# Altium PCB HeadBoard.PcbDoc
Units mm, origin at the board's own origin, x right, y up, seen from the top; angles counter-clockwise.
Board outline 152.4 x 101.6 mm, 2 copper layers (Top Layer, Bottom Layer); 27 components, 34 nets, 166 pads, 0 vias.
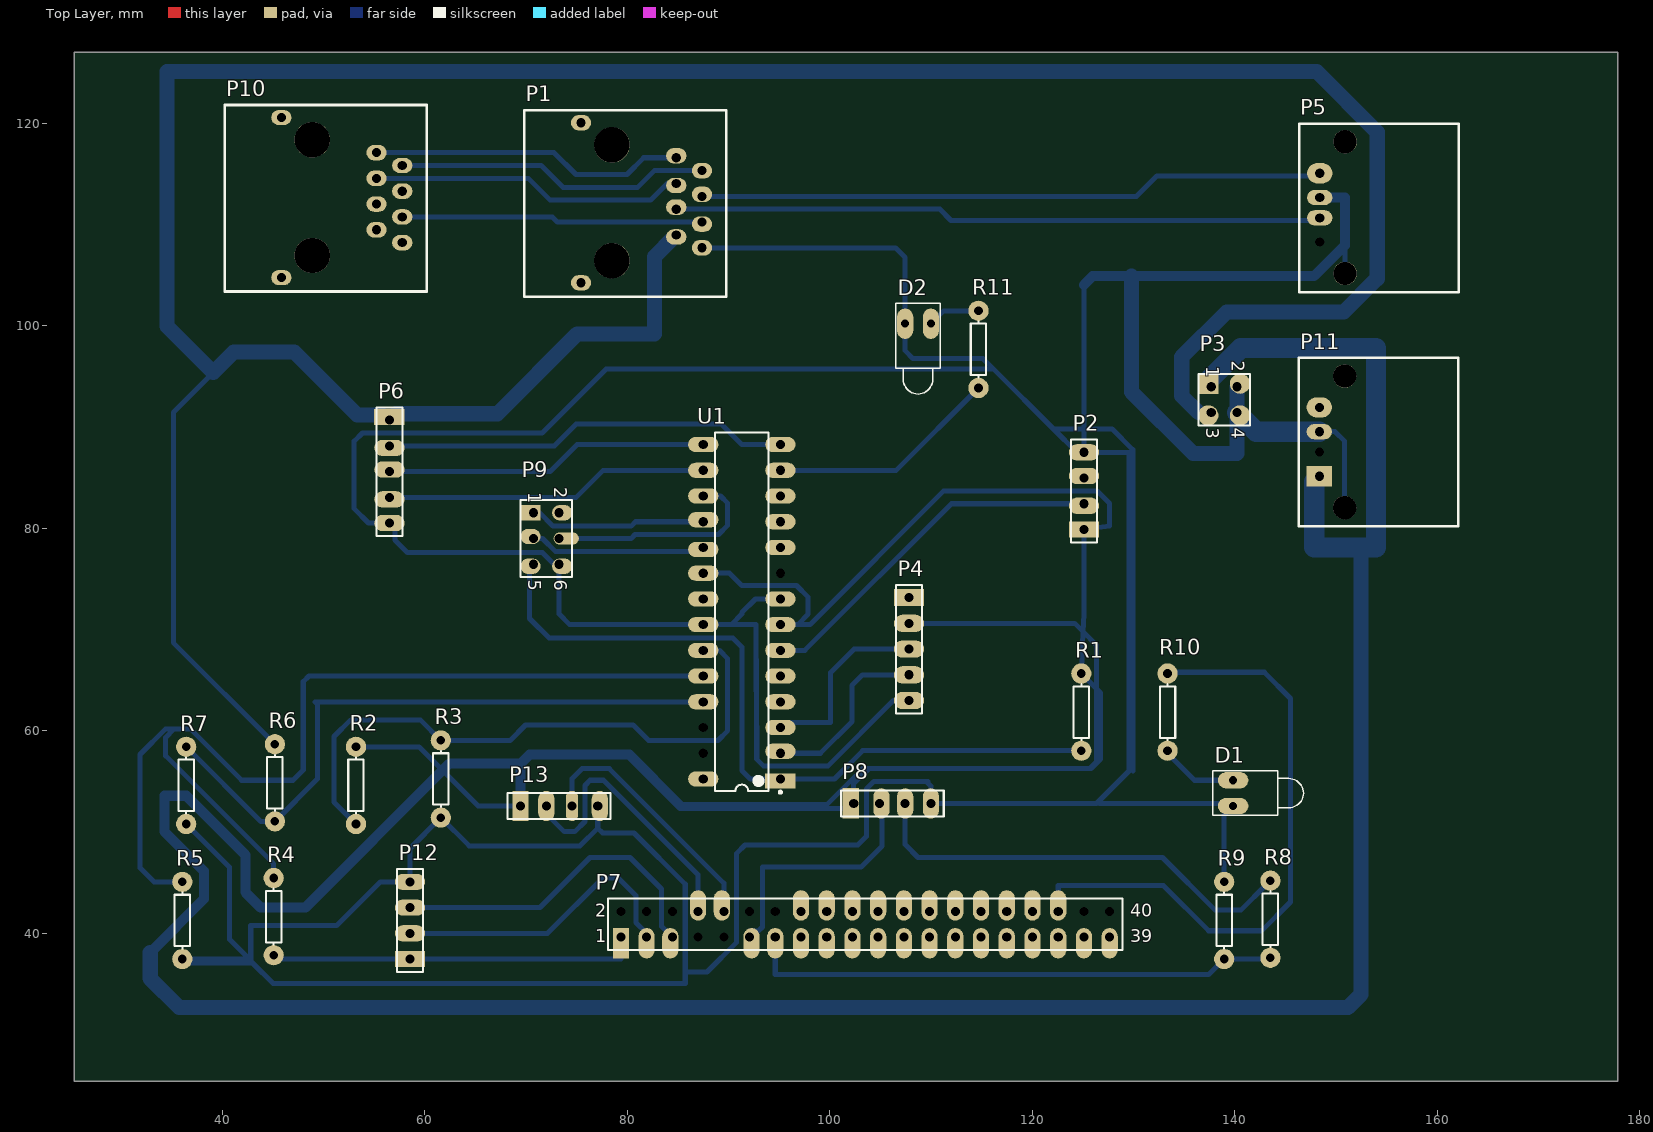
[diagram p0: Top Layer view]
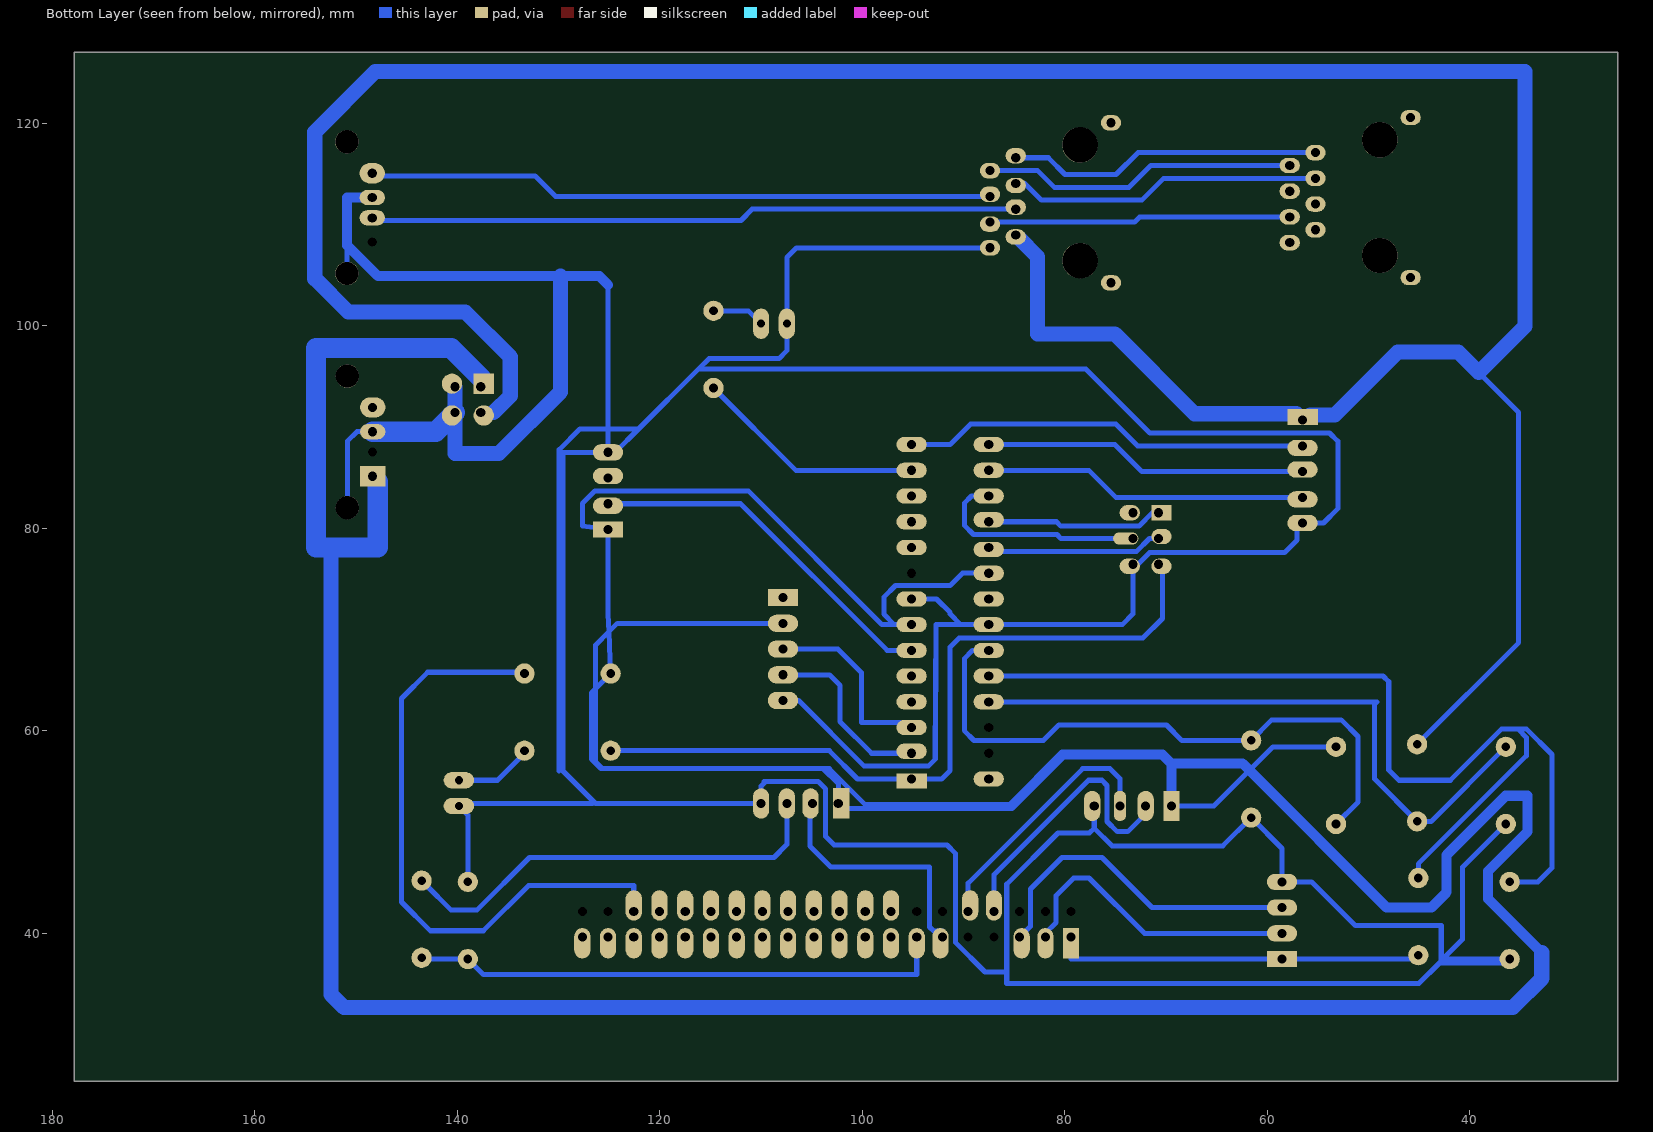
[diagram p1: Bottom Layer view, seen from below]

## Layer stack, top to bottom
Top Solder: solder mask 0.0102, Solder Resist, Dk 3.5
Top Layer: signal copper 0.0356
Dielectric 1: dielectric 0.32, FR-4, Dk 4.8
Bottom Layer: signal copper 0.0356
Bottom Solder: solder mask 0.0102, Solder Resist, Dk 3.5

## Board outline
25.4,25.4 177.8,25.4 177.8,127 25.4,127

## Design rules (kind name [scope] priority, off if disabled: settings)
Clearance [All] p1: gap=0.2
PolygonConnect [All] p1: connectstyle=Relief reliefconductorwidth=0.254 reliefentries=4 polygonreliefangle="90 Angle" airgapwidth=0.254
RoutingLayers [All] p1: top layer_v5=FALSE bottom layer_v5=TRUE
RoutingVias [All] p1: holewidth=0.711 width=1.27 viastyle="Through Hole" minholewidth=0.711 minwidth=1.27 maxholewidth=0.711 maxwidth=1.27
SolderMaskExpansion [All] p1: expansion=0.102
Width [All] p1: maxlimit=2 minlimit=0.2 preferedwidth=0.5
29 further rules are at their usual default settings.

## Components (designator, comment, footprint, x,y, rotation, side; value= is the part's Value field where it differs from the comment)
D1 "Green" LED-1 139.827,53.848 r0 top
D2 "Red" LED-1 108.712,100.203 r270 top
P1 "RJ45 PUE - Tail" RJ45#1 87.376,115.316 r270 top
P2 "DHT11" HDR1X4#1 125.095,79.883 r90 top
P3 "Buck Conveter" HDR2X2 137.668,93.98 r270 top
P4 "USB to TTL - RPi" HDR1X5#1 107.823,73.152 r270 top
P5 "USB Data - RPi" USB_Female#1 148.376,108.256 r90 top
P6 "Flash" HDR1X5#2 56.515,90.678 r270 top
P7 "IDE GPIO - RPi" HDR2X20 79.375,39.624 r0 top
P8 "JSN-SR04T" HDR1X4#2 102.362,52.832 r0 top
P9 "ICSP" HDR2X3 70.739,81.534 r270 top
P10 "RJ45 Ethernet - RPi" RJ45#2 57.785,115.824 r270 top
P11 "USB Power - RPi" USB_Female#2 148.336,85.135 r90 top
P12 "ADXL345" HDR1X4#3 58.547,37.465 r90 top
P13 "RPi UART" HDR1X4#4 69.469,52.578 r0 top
R1 "Res1" AXIAL-0.3 124.841,61.849 r90 top
R2 "Res1" AXIAL-0.3 53.213,54.61 r90 top
R3 "Res1" AXIAL-0.3 61.595,55.245 r90 top
R4 "Res1" AXIAL-0.3 45.085,41.656 r270 top
R5 "Res1" AXIAL-0.3 36.068,41.275 r90 top
R6 "Res1" AXIAL-0.3 45.212,54.864 r90 top
R7 "Res1" AXIAL-0.3 36.449,54.61 r90 top
R8 "Res1" AXIAL-0.3 143.51,41.402 r270 top
R9 "Res1" AXIAL-0.3 138.938,41.275 r270 top
R10 "Res1" AXIAL-0.3 133.35,61.849 r90 top
R11 "Res1" AXIAL-0.3 114.681,97.663 r270 top
U1 "ATmega328-PU" 28P3 91.313,71.755 r180 top

## Footprints (in the part's own frame and the unit in brackets; to place one, negate y for a bottom-side part, rotate by r counter-clockwise, add the part's x,y. Pads: shape width x height; smd on the part's side, far side on the other; paste and mask are expansions set on the pad)
28P3 [mm] "DIP, 28-Leads, Row Spacing 7.62mm, Pitch 2.54mm, Body 34.67x7.3mm"
  rect 3x1.5 hole 0.9 copper offset 0,0.2: 1(-3.81,16.51)
  oval 3x1.5 hole 0.9 copper offset 0,-0.2: 2(-3.81,13.97) 18(3.81,-8.89)
  oval 3x1.5 hole 0.9: 3(-3.81,11.43) 4(-3.81,8.89) 5(-3.81,6.35) 6(-3.81,3.81) 7(-3.81,1.27) 8(-3.81,-1.27) 10(-3.81,-6.35) 11(-3.81,-8.89) 12(-3.81,-11.43) 13(-3.81,-13.97) 14(-3.81,-16.51) 15(3.81,-16.51) 16(3.81,-13.97) 17(3.81,-11.43) 20(3.81,-3.81) 21(3.81,-1.27) 22(3.81,1.27) 23(3.81,3.81) 24(3.81,6.35) 25(3.81,8.89) 28(3.81,16.51)
  round 0.5 hole 0.9: 9(-3.81,-3.81) 26(3.81,11.43) 27(3.81,13.97)
  oval 3x1.5 hole 0.9 copper offset 0,0.2: 19(3.81,-6.35)
  silkscreen extent -3.94,-17.7 2.65,17.93, body extent -3.6,-17.65 3.6,17.65, height 4.58
AXIAL-0.3 [mm] "Axial Device, Thru-Hole; 2 Leads; 0.3 in Pin Spacing"
  round 2 hole 0.85: 1(-3.81,0) 2(3.81,0)
  silkscreen extent -2.77,-0.76 2.77,0.76
HDR1X4#1 [mm] "Connector; Header; 4 Position"
  rect 1.6x3 hole 0.9: 1(0,0)
  oval 1.6x3 hole 0.9 copper offset -0.2,0: 2(2.54,0)
  oval 1.6x3 hole 0.9 copper offset 0.2,0: 3(5.08,0)
  oval 1.6x3 hole 0.9: 4(7.62,0)
  silkscreen extent -1.27,-1.27 8.89,1.27
HDR1X4#2 [mm] "Connector; Header; 4 Position"
  rect 1.6x3 hole 0.9 copper offset -0.3,0: 1(0,0)
  oval 1.6x3 hole 0.9 copper offset 0.2,0: 2(2.54,0)
  oval 1.6x3 hole 0.9: 3(5.08,0) 4(7.62,0)
  silkscreen extent -1.27,-1.27 8.89,1.27
HDR1X4#3 [mm] "Connector; Header; 4 Position"
  rect 1.6x3 hole 0.9: 1(0,0)
  oval 1.6x3 hole 0.9: 2(2.54,0) 3(5.08,0) 4(7.62,0)
  silkscreen extent -1.27,-1.27 8.89,1.27
HDR1X4#4 [mm] "Connector; Header; 4 Position"
  rect 1.6x3 hole 0.9: 1(0,0)
  oval 1.6x3 hole 0.9: 2(2.54,0)
  oval 1.2x3 hole 0.9: 3(5.08,0)
  oval 1.6x3 hole 0.9 copper offset 0.2,0: 4(7.62,0)
  silkscreen extent -1.27,-1.27 8.89,1.27
HDR1X5#1 [mm] "Connector; Header; 5 Position"
  rect 1.7x3 hole 0.9: 1(0,0)
  oval 1.7x3 hole 0.9: 2(2.54,0) 3(5.08,0) 4(7.62,0) 5(10.16,0)
  silkscreen extent -1.27,-1.27 11.43,1.27
HDR1X5#2 [mm] "Connector; Header; 5 Position"
  rect 1.6x3 hole 0.9 copper offset -0.3,0: 1(0,0)
  oval 1.6x3 hole 0.9 copper offset 0.2,0: 2(2.54,0) 4(7.62,0)
  oval 1.6x3 hole 0.9 copper offset -0.2,0: 3(5.08,0)
  oval 1.6x3 hole 0.9: 5(10.16,0)
  silkscreen extent -1.27,-1.27 11.43,1.27
HDR2X2 [mm] "Connector; Header; 2x2 Position"
  rect 2x2 hole 0.9 copper offset -0.3,-0.3: 1(0,0)
  round 2 hole 0.9 copper offset -0.3,0.3: 2(0,2.54)
  round 2 hole 0.9 copper offset 0.3,-0.3: 3(2.54,0)
  round 2 hole 0.9 copper offset 0.3,0.3 paste+0: 4(2.54,2.54)
  silkscreen extent -1.27,-1.27 3.81,3.81
HDR2X3 [mm] "Connector; Header; 3x2 Position"
  rect 1.5x2 hole 0.9 copper offset 0,-0.3: 1(0,0)
  oval 1.5x2 hole 0.9 copper offset 0,0.3: 2(0,2.54)
  oval 1.5x2 hole 0.9 copper offset -0.2,-0.3: 3(2.54,0)
  oval 1.2x2.5 hole 0.9 copper offset 0,0.7: 4(2.54,2.54)
  oval 1.5x2 hole 0.9 copper offset 0.2,-0.3: 5(5.08,0)
  oval 1.5x2 hole 0.9 copper offset 0.2,0.3: 6(5.08,2.54)
  silkscreen extent -1.27,-1.27 6.35,3.81
HDR2X20 [mm] "Connector; Header; 20x2 Position"
  rect 1.6x3 hole 0.9 copper offset 0,-0.6: 1(0,0)
  round 0.5 hole 0.9: 2(0,2.54) 4(2.54,2.54) 6(5.08,2.54) 7(7.62,0) 9(10.16,0) 12(12.7,2.54) 14(15.24,2.54) 38(45.72,2.54) 40(48.26,2.54)
  oval 1.6x3 hole 0.9 copper offset 0,-0.6: 3(2.54,0) 13(15.24,0) 15(17.78,0) 17(20.32,0) 19(22.86,0) 21(25.4,0) 23(27.94,0) 25(30.48,0) 27(33.02,0) 29(35.56,0) 31(38.1,0) 33(40.64,0) 35(43.18,0) 37(45.72,0) 39(48.26,0)
  oval 1.6x3 hole 0.9 copper offset -0.2,-0.6: 5(5.08,0)
  oval 1.6x3 hole 0.9 copper offset 0,0.6: 8(7.62,2.54) 16(17.78,2.54) 18(20.32,2.54) 20(22.86,2.54) 22(25.4,2.54) 24(27.94,2.54) 26(30.48,2.54) 28(33.02,2.54) 30(35.56,2.54) 32(38.1,2.54) 34(40.64,2.54) 36(43.18,2.54)
  oval 1.6x3 hole 0.9 copper offset -0.2,0.6: 10(10.16,2.54)
  oval 1.6x3 hole 0.9 copper offset 0.2,-0.6: 11(12.7,0)
  silkscreen extent -1.27,-1.27 49.53,3.81
LED-1 [mm] "LED; 2 Leads"
  oval 3x1.6 hole 0.8: 1(0,1.27) 2(0,-1.27)
  silkscreen extent -2,-2.2 6.95,2.2
RJ45#1 [mm]
  oval 1.524x2 hole 0.9: 1(7.62,0) 7(0,0)
  oval 1.524x2 hole 0.9 copper offset 0.2,0: 2(6.35,-2.54) 3(5.08,0) 6(1.27,-2.54)
  oval 1.524x2 hole 0.9 copper offset -0.2,0: 4(3.81,-2.54) 5(2.54,0) 8(-1.27,-2.54)
  round 3.5 hole 3.5: 9(-2.54,-8.89) 10(8.89,-8.89)
  oval 1.5x2 hole 0.9: 11(-4.725,-11.94) 12(11.075,-11.94)
  silkscreen extent -5.97,-17.53 12.45,2.41
RJ45#2 [mm]
  oval 1.524x2 hole 0.9: 1(7.62,0) 2(6.35,-2.54) 3(5.08,0) 4(3.81,-2.54) 5(2.54,0) 6(1.27,-2.54) 7(0,0) 8(-1.27,-2.54)
  round 3.5 hole 3.5: 9(-2.54,-8.89) 10(8.89,-8.89)
  oval 1.5x2 hole 0.9: 11(-4.725,-11.94) 12(11.075,-11.94)
  silkscreen extent -5.97,-17.53 12.45,2.41
USB_Female#1 [mm]
  rect 0.5x0.5 hole 0.9: 1(0,0)
  oval 1.5x2.5 hole 0.9: 2(2.4,0) 4(4.4,0)
  oval 2x2.5 hole 0.9: 3(6.8,0)
  round 2.3 hole 2.3: 4(-3.1,-2.5) 5(9.9,-2.5)
  silkscreen extent -4.95,-13.72 11.68,2.03
USB_Female#2 [mm]
  rect 2x2.5 hole 0.9: 1(0,0)
  round 0.5 hole 0.9: 2(2.4,0)
  oval 2x2.5 hole 0.9: 3(6.8,0)
  round 2.3 hole 2.3: 4(-3.1,-2.5) 5(9.9,-2.5)
  oval 1.5x2.5 hole 0.9: 4(4.4,0)
  silkscreen extent -4.95,-13.72 11.68,2.03

## Part data
D1 D2: library part LED1, "Typical RED GaAs LED"
P1 P10: library part "Header 8", "Header, 8-Pin"
P2 P5 P8 P11 P12 P13: library part "Header 4", "Header, 4-Pin"
P3: library part "Header 2X2", "Header, 2-Pin, Dual row"
P4 P6: library part "Header 5", "Header, 5-Pin"
P7: library part "Header 20X2", "Header, 20-Pin, Dual row"
P9: library part "Header 3X2", "Header, 3-Pin, Dual row"
R1 R2 R3 R4 R5 R6 R7 R8 R9 R10 R11: "Resistor"
U1: "8-bit AVR Microcontroller, 32KB Flash, 1KB EEPROM, 2KB SRAM, 28-pin PDIP, Industrial Grade (-40°C to 85°C)"

## Nets (pads, with @x,y where several pads share a name; then routed paths per layer and width w, separated by ;. In a path a pad name is that pad's centre, name@x,y a point inside that pad or via, vN(x,y) a via of type N, cw(c..) or ccw(c..) an arc to the next point about the centre after c; other vN are vias at no path point)
3V3: P7.1 P12.1 R4.2 | length 36.6
  Bottom Layer w0.5: R4.2 45.427,37.465 P12.1 79.375,37.465 P7.1
3V3_MON: R4.1 R5.2 U1.24 | length 103.6
  Bottom Layer w0.5: R5.2 33.274,45.085 31.877,46.482 31.877,57.658 34.417,60.198 35.281,60.198 ; R4.1 45.085,46.863 34.417,57.531 34.417,59.334 35.281,60.198 ; U1.24 48.565,65.405 48.006,64.846 48.006,56.134 46.99,55.118 41.935,55.118 36.855,60.198 35.281,60.198
BUCK_IN: P1.2 P3.3 P6.1 R6.2 | length 299.9
  Bottom Layer w0.5: 39.116,95.377 35.179,91.44 35.179,68.707 R6.2 ; 136.398,91.44 P3.3
  Bottom Layer w1.5: P6.1@56.007,90.932 55.753,91.186 53.34,91.186 47.117,97.409 41.148,97.409 39.116,95.377 34.544,99.949 34.544,125.095 148.082,125.095 154.051,119.126 154.051,104.648 150.749,101.346 139.192,101.346 134.747,96.901 134.747,93.091 136.398,91.44 ; P6.1@57.15,91.313 67.183,91.313 75.057,99.187 82.677,99.187 82.677,106.807 P1.2@84.519,108.648
BUCK_IN_MON: R6.1 R7.2 U1.25 | length 63.8
  Bottom Layer w0.5: R7.2 43.815,51.054 R6.1 49.403,55.245 49.403,62.636 49.174,62.865 U1.25
CHIP_LED: R11.2 U1.13 | length 22.9
  Bottom Layer w0.5: U1.13 106.553,85.725 R11.2
CON_RXD: P7.10 P13.3 | length 25.6
  Bottom Layer w0.5: P13.3 74.549,55.27 75.54,56.261 78.229,56.261 89.535,44.955 P7.10
CON_TXD: P7.8 P13.2 | length 28.2
  Bottom Layer w0.5: P13.2 72.009,51.816 73.787,50.038 74.803,50.038 75.819,51.054 75.819,54.61 76.327,55.118 77.663,55.118 86.995,45.786 P7.8
D+: P1.5 P5.3 | length 61.2
  Bottom Layer w0.5: P1.5 130.277,112.776 132.303,114.802 P5.3@147.701,114.802
D-: P1.4 P5.2 | length 63.6
  Bottom Layer w0.5: P1.4 110.871,111.506 111.975,110.402 P5.2@147.955,110.402
DHT11_D: P2.2 U1.6 | length 36
  Bottom Layer w0.5: U1.6 97.533,67.945 112.011,82.423 P2.2
ECHO: P8.3 R8.1 | length 44.4
  Bottom Layer w0.5: P8.3 107.442,48.768 108.712,47.498 132.842,47.498 138.049,42.291 140.589,42.291 143.129,44.831 R8.1@144.018,44.831
FLASH1_D: P6.2 U1.14 | length 40.3
  Bottom Layer w0.5: P6.2 72.808,88.138 74.967,90.297 89.281,90.297 91.313,88.265 U1.14
FLASH2_D: P6.3 U1.15 | length 32.1
  Bottom Layer w0.5: P6.3 72.39,85.598 75.057,88.265 U1.15
FLASH3_D: P6.4 U1.16 | length 32.1
  Bottom Layer w0.5: P6.4 74.955,83.058 77.622,85.725 U1.16
GND: D1.2 D2.2 P1.1 P2.4 P3.2 P3.4 P4.5 P5.4 P6.5 P8.4 P9.6 P11.4 P12.4 P13.4 R3.1 R5.1 R7.1 R9.1 U1.8 U1.22 | length 615.2
  Bottom Layer w0.5: R7.1 40.716,46.533 40.716,39.421 42.672,37.465 ; 72.644,76.581 71.628,77.597 58.293,77.597 57.048,78.842 57.048,80.518 P6.5 54.458,80.518 53.035,81.94 53.035,88.595 53.848,89.408 71.603,89.408 77.902,95.707 116.18,95.707 ; P9.6 73.279,71.526 74.32,70.485 U1.22 90.272,70.485 ; P13.4 77.089,50.394 ; P1.1 106.477,107.696 107.442,106.731 D2.2 107.442,97.536 108.204,96.774 115.113,96.774 116.18,95.707 ; U1.8 92.659,73.025 91.313,71.679 91.313,71.526 90.272,70.485 ; P4.5 106.274,62.992 99.797,56.515 93.472,56.515 92.786,57.201 92.71,70.485 90.272,70.485 ; 109.677,54.991 109.525,54.991 ; 125.095,104.038 125.095,89.796 ; 126.619,52.832 139.192,52.832 139.192,52.705 139.827,52.705 D1.2 138.938,51.689 R9.1 ; 129.921,56.032 129.921,87.757 127.882,89.796 125.095,89.796 ; P11.4@148.336,89.535 149.896,89.535 150.836,88.595 P11.4@150.836,82.035 ; P5.4@148.376,112.656 P5.4@148.383,112.649 ; P5.4@150.876,105.156 150.876,107.95 ; 42.672,37.465 R5.1 36.449,37.084 43.002,37.084 ; 42.672,37.465 42.824,37.465 ; 42.672,37.465 42.824,37.313 ; 42.824,37.313 42.824,37.262 43.002,37.084 ; 42.824,37.313 42.824,37.465 ; 42.824,37.465 42.824,40.767 51.308,40.767 55.626,45.085 P12.4 58.547,48.387 R3.1 64.389,48.641 75.336,48.641 77.089,50.394 ; 43.002,37.084 45.034,35.052 85.725,35.052 85.725,36.195 ; 77.089,50.394 77.572,49.911 80.67,49.911 85.725,44.856 85.725,36.195 ; 85.725,36.195 87.884,36.195 90.805,39.116 90.805,47.904 91.618,48.717 102.768,48.717 103.632,49.581 103.632,54.274 104.349,54.991 109.525,54.991 ; 109.525,54.991 109.982,54.534 P8.4 126.34,52.832 129.54,56.032 129.54,87.503 P2.4 ; 116.18,95.707 122.091,89.796 ; 122.091,89.796 125.095,89.796 ; 122.091,89.796 124.384,87.503 P2.4 ; P2.4 125.095,89.796
  Bottom Layer w1: 125.095,104.038 125.959,104.902 129.794,104.902 ; 130.175,104.902 147.828,104.902 150.876,107.95 150.876,112.649 P5.4@148.383,112.649
  Bottom Layer w1.5: 129.794,104.902 129.794,93.472 135.89,87.376 140.208,87.376 P3.4 P3.2
  Bottom Layer w2: P3.4 142.113,89.535 P11.4@148.336,89.535
MISO: P9.1 U1.18 | length 17.5
  Bottom Layer w0.5: P9.1 71.349,81.534 72.669,80.213 80.391,80.213 80.823,80.645 U1.18
MOSI: P9.4 U1.17 | length 22.1
  Bottom Layer w0.5: P9.4 80.391,78.994 80.772,79.375 89.002,79.375 89.916,80.289 89.916,82.474 89.205,83.185 U1.17
NetD1_1: D1.1 R10.1 | length 7.7
  Bottom Layer w0.5: R10.1@133.286,57.848 136.017,55.118 D1.1
NetD2_1: D2.1 R11.1 | length 5.2
  Bottom Layer w0.5: D2.1 111.252,101.473 R11.1
NetP7_13: P7.13 R8.2 R9.2 | length 53.8
  Bottom Layer w0.5: P7.13 94.615,35.941 137.414,35.941 R9.2 143.764,37.465 R8.2@144.018,37.211
RESET: P9.5 R1.1 U1.1 | length 75.1
  Bottom Layer w0.5: P9.5 70.358,76.454 70.358,71.095 72.288,69.164 90.424,69.164 91.313,68.275 91.313,56.083 92.151,55.245 U1.1 100.457,55.245 103.251,58.039 R1.1
RPI_LED: P7.36 R10.2 | length 61.8
  Bottom Layer w0.5: P7.36 122.555,44.714 132.959,44.714 137.414,40.259 142.646,40.259 145.491,43.104 145.491,63.195 142.9,65.786 R10.2@133.35,65.786
RX+: P1.6 P10.6 | length 31.2
  Bottom Layer w0.5: P10.6 70.231,114.554 72.39,112.395 82.296,112.395 83.947,114.046 P1.6
RX-: P1.3 P10.3 | length 29.8
  Bottom Layer w0.5: P10.3 72.593,110.744 73.101,110.236 P1.3
RXD: P4.4 U1.2 | length 18
  Bottom Layer w0.5: U1.2 99.06,57.785 102.184,60.909 102.184,64.491 103.226,65.532 P4.4
SCK: P9.3 U1.19 | length 17.5
  Bottom Layer w0.5: P9.3 71.628,78.994 72.935,77.687 87.085,77.687 U1.19
SCL: P7.5 P12.3 | length 33.4
  Bottom Layer w0.5: P12.3 71.374,42.545 76.327,47.498 80.264,47.498 83.388,44.374 83.388,40.691 P7.5
SDA: P7.3 P12.2 | length 29.8
  Bottom Layer w0.5: P12.2 72.136,40.005 77.597,45.466 79.121,45.466 80.848,43.739 80.848,41.072 81.915,40.005 P7.3
TRIG: P7.11 P8.2 | length 24.9
  Bottom Layer w0.5: P7.11 92.075,40.208 92.913,40.208 93.345,40.64 93.345,46.558 103.099,46.558 105.156,48.616 105.156,52.578 P8.2
TX+: P1.8 P10.8 | length 31.2
  Bottom Layer w0.5: P10.8 72.771,117.094 74.93,114.935 79.975,114.935 81.626,116.586 P1.8
TX-: P1.7 P10.7 | length 31.2
  Bottom Layer w0.5: P10.7 71.501,115.824 73.66,113.665 81.026,113.665 82.677,115.316 P1.7
TXD: P4.3 U1.3 | length 19
  Bottom Layer w0.5: U1.3 95.377,60.071 95.504,60.071 96.266,60.833 100.076,60.833 100.076,65.735 102.413,68.072 P4.3
VCC: P2.1 P3.1 P4.2 P8.1 P11.1 P13.1 R1.2 R2.2 U1.7 U1.20 | length 513.5
  Bottom Layer w0.5: R2.2 59.436,58.42 61.76,56.096 65.278,52.578 P13.1 ; U1.20 90.094,75.565 91.313,74.346 96.723,74.346 97.866,73.203 97.866,71.526 96.825,70.485 ; U1.7 96.825,70.485 ; P4.2 124.181,70.612 125.019,69.773 ; P3.1 P3.1@137.668,94.869 ; P11.1@147.828,84.627 P11.1 ; 96.825,70.485 98.044,70.485 111.252,83.693 126.39,83.693 127.635,82.448 127.635,80.213 P2.1 125.095,71.526 125.019,69.773 ; 103.861,56.261 125.654,56.261 ; 103.861,56.261 102.362,54.762 P8.1 101.854,52.324 85.217,52.324 79.883,57.658 79.629,57.912 80.264,57.912 85.471,52.705 99.695,52.705 103.251,56.261 103.861,56.261 ; 125.019,69.773 R1.2 126.314,64.186 ; 125.019,69.773 126.314,68.478 126.314,64.186 ; 125.654,56.261 125.806,56.261 126.746,57.201 126.746,63.754 126.314,64.186 ; 125.654,56.261 126.314,56.921 126.314,64.186
  Bottom Layer w1: 32.893,38.1 38.202,43.409 38.202,46.15 34.29,50.061 34.29,53.594 36.449,53.594 42.291,47.752 42.291,44.069 43.815,42.545 48.209,42.545 61.76,56.096 62.433,56.769 69.469,56.769 ; P13.1 69.469,56.769 ; 79.883,57.658 70.358,57.658 69.469,56.769
  Bottom Layer w1.5: 32.893,38.1 32.893,35.56 35.763,32.69 151.181,32.69 152.451,33.96 152.451,77.902
  Bottom Layer w2: P3.1@137.668,94.869 140.589,97.79 153.924,97.79 153.924,78.105 147.828,78.105 P11.1@147.828,84.627
VCC_MON: R2.1 R3.2 U1.23 | length 61.4
  Bottom Layer w0.5: R2.1 51.054,52.959 51.054,59.436 52.705,61.087 59.563,61.087 R3.2 68.434,59.055 69.958,60.579 80.588,60.579 82.112,59.055 88.951,59.055 89.916,60.02 89.916,67.131 89.102,67.945 U1.23
pads on no net: P1.9 P1.10 P1.11 P1.12 P2.3 P4.1 P5.1 P5.5 P7.2 P7.4 P7.6 P7.7 P7.9 P7.12 P7.14 P7.15 P7.16 P7.17 P7.18 P7.19 P7.20 P7.21 P7.22 P7.23 P7.24 P7.25 P7.26 P7.27 P7.28 P7.29 P7.30 P7.31 P7.32 P7.33 P7.34 P7.35 P7.37 P7.38 P7.39 P7.40 P9.2 P10.1 P10.2 P10.4 P10.5 P10.9 P10.10 P10.11 P10.12 P11.2 P11.3 P11.5 U1.4 U1.5 U1.9 U1.10 U1.11 U1.12 U1.21 U1.26 U1.27 U1.28

## Text inside footprints (layer, text, board x,y; h text height)
P3: Top Overlay "3" at 137.16,89.916 h1.27 r270; Top Overlay "4" at 139.7,89.916 h1.27 r270; Top Overlay "2" at 139.7,96.52 h1.27 r270; Top Overlay "1" at 137.16,96.012 h1.27 r270
P7: Top Overlay "39" at 129.667,39.116 h1.27; Top Overlay "40" at 129.667,41.656 h1.27; Top Overlay "2" at 76.835,41.656 h1.27; Top Overlay "1" at 76.835,39.116 h1.27
P9: Top Overlay "1" at 70.231,83.566 h1.27 r270; Top Overlay "2" at 72.771,84.074 h1.27 r270; Top Overlay "5" at 70.231,74.93 h1.27 r270; Top Overlay "6" at 72.771,74.93 h1.27 r270